# Altium PCB Snippet of PCB_WM8804.pcbdoc
Units mil, origin at the board's own origin, x right, y up, seen from the top; angles counter-clockwise.
Board outline not stored, 2 copper layers (Top Layer, Bottom Layer); 13 components, 0 nets, 46 pads, 0 vias.
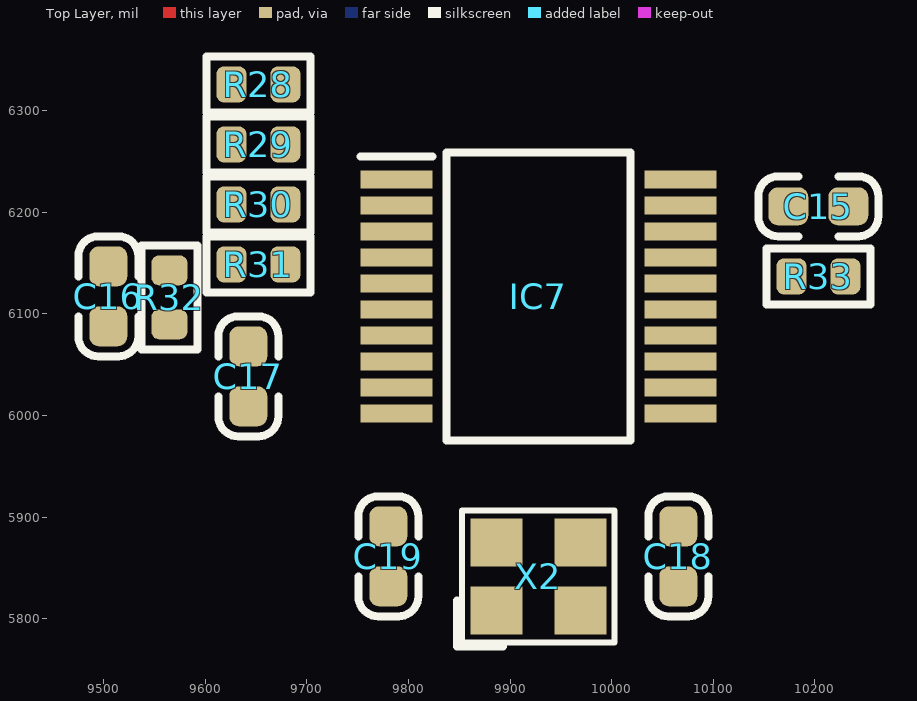
[diagram p0: Top Layer view]
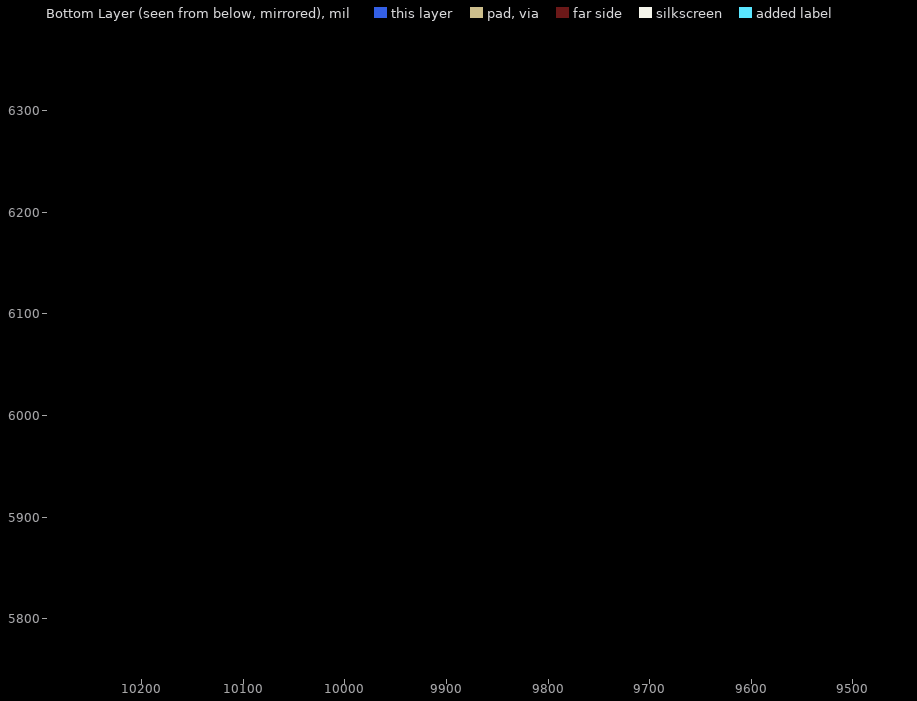
[diagram p1: Bottom Layer view, seen from below]

## Layer stack, top to bottom
Top Solder: solder mask 0.4, Solder Resist, Dk 3.5
Top Layer: signal copper 1.4
Dielectric 1: dielectric 12.6, FR-4, Dk 4.8
Bottom Layer: signal copper 1.4
Bottom Solder: solder mask 0.4, Solder Resist, Dk 3.5

## Components (designator, comment, footprint, x,y, rotation, side; value= is the part's Value field where it differs from the comment)
C15 "100nF" C_0603 10203.31,6205.98 r0 top
C16 "100nF" C_0603 9504.49,6117.4 r90 top
C17 "1uF" C_0603 9642.28,6038.66 r270 top
C18 "15pF" C_0603 10065.51,5861.5 r270 top
C19 "15pF" C_0603 9780.08,5861.5 r90 top
IC7 "WM8804GEDS_RV" SOP65P780X200-20N 9927.72,6117.4 r0 top
R28 "10kΩ" R_0603 9652.13,6326.06 r0 top
R29 "10kΩ" R_0603 9652.13,6267.01 r0 top
R30 "10kΩ" R_0603 9652.13,6207.95 r0 top
R31 "10kΩ" R_0603 9652.13,6148.9 r0 top
R32 "10kΩ" R_0603 9564.53,6116.46 r270 top
R33 "0Ω" R_0603 10203.31,6137.09 r0 top
X2 "27Mhz/15pF" XTAL_3225-4P 9927.72,5841.81 r0 top

## Footprints (in the part's own frame and the unit in brackets; to place one, negate y for a bottom-side part, rotate by r counter-clockwise, add the part's x,y. Pads: shape width x height; smd on the part's side, far side on the other; paste and mask are expansions set on the pad)
C_0603 [mm] "Chip Capacitor, 2-Leads, Body 1.60x0.80mm, IPC Medium Density"
  rrect50% 1x0.95 smd: 1(-0.75,0) 2(0.75,0)
  silkscreen extent -1.5,-0.75 1.5,0.75, body extent -0.8,-0.4 0.8,0.4, height 0.87
R_0603 [mm] "Chip Resistor, 2-Leads, Body 1.60x0.80mm, IPC Medium Density"
  rrect50% 0.75x0.9 smd: 1(-0.675,0) 2(0.675,0)
  silkscreen extent -1.3,-0.7 1.3,0.7, body extent -0.8,-0.42 0.8,0.43, height 0.6
SOP65P780X200-20N [mm]
  rect 1.8x0.45 smd: 1(-3.55,2.925) 2(-3.55,2.275) 3(-3.55,1.625) 4(-3.55,0.975) 5(-3.55,0.325) 6(-3.55,-0.325) 7(-3.55,-0.975) 8(-3.55,-1.625) 9(-3.55,-2.275) 10(-3.55,-2.925) 11(3.55,-2.925) 12(3.55,-2.275) 13(3.55,-1.625) 14(3.55,-0.975) 15(3.55,-0.325) 16(3.55,0.325) 17(3.55,0.975) 18(3.55,1.625) 19(3.55,2.275) 20(3.55,2.925)
  silkscreen extent -4.45,-3.6 2.3,3.6, body extent -3.9,-3.6 3.9,3.6, height 2
XTAL_3225-4P [mm]
  rect 1.3x1.2 smd: 1(-1.05,-0.85) 2(1.05,-0.85) 3(1.05,0.85) 4(-1.05,0.85)
  silkscreen extent -2.03,-1.75 1.91,1.65, body extent -1.47,-1.27 1.73,1.23, height 0.7

## Part data
C15 C16 C17 C18 C19: library part Cap_Chip, "贴片电容"
IC7: "Integrated Circuit", Manufacturer_Name="Cirrus Logic", Manufacturer_Part_Number=WM8804GEDS/RV, Mouser Part Number=238-WM8804GEDS/RV, Datasheet Link=https://d3uzseaevmutz1.cloudfront.net/pubs/proDatasheet/WM8804_v4.5.pdf, Height=2mm, Mouser Price/Stock=https://www.mouser.co.uk/ProductDetail/Cirrus-Logic/WM8804GEDS-RV?qs=%2F%252BPMR94VuMYwzSe6qKCihg%3D%3D
R28 R29 R30 R31 R32 R33: library part Res_Chip, "贴片电阻"
X2: library part Crystal_4P, "4脚无源晶振"

## Nets (pads, with @x,y where several pads share a name; then routed paths per layer and width w, separated by ;. In a path a pad name is that pad's centre, name@x,y a point inside that pad or via, vN(x,y) a via of type N, cw(c..) or ccw(c..) an arc to the next point about the centre after c; other vN are vias at no path point)
pads on no net: C15.1 C15.2 C16.1 C16.2 C17.1 C17.2 C18.1 C18.2 C19.1 C19.2 IC7.1 IC7.2 IC7.3 IC7.4 IC7.5 IC7.6 IC7.7 IC7.8 IC7.9 IC7.10 IC7.11 IC7.12 IC7.13 IC7.14 IC7.15 IC7.16 IC7.17 IC7.18 IC7.19 IC7.20 R28.1 R28.2 R29.1 R29.2 R30.1 R30.2 R31.1 R31.2 R32.1 R32.2 R33.1 R33.2 X2.1 X2.2 X2.3 X2.4